# Altium PCB vfd_power_v1.PcbDoc
Units mil, origin at the board's own origin, x right, y up, seen from the top; angles counter-clockwise.
Board outline 7500 x 4000 mil, 2 copper layers (Top Layer, Bottom Layer); 84 components, 41 nets, 235 pads, 0 vias.
Unrouted connection lines stored in the file: 179.
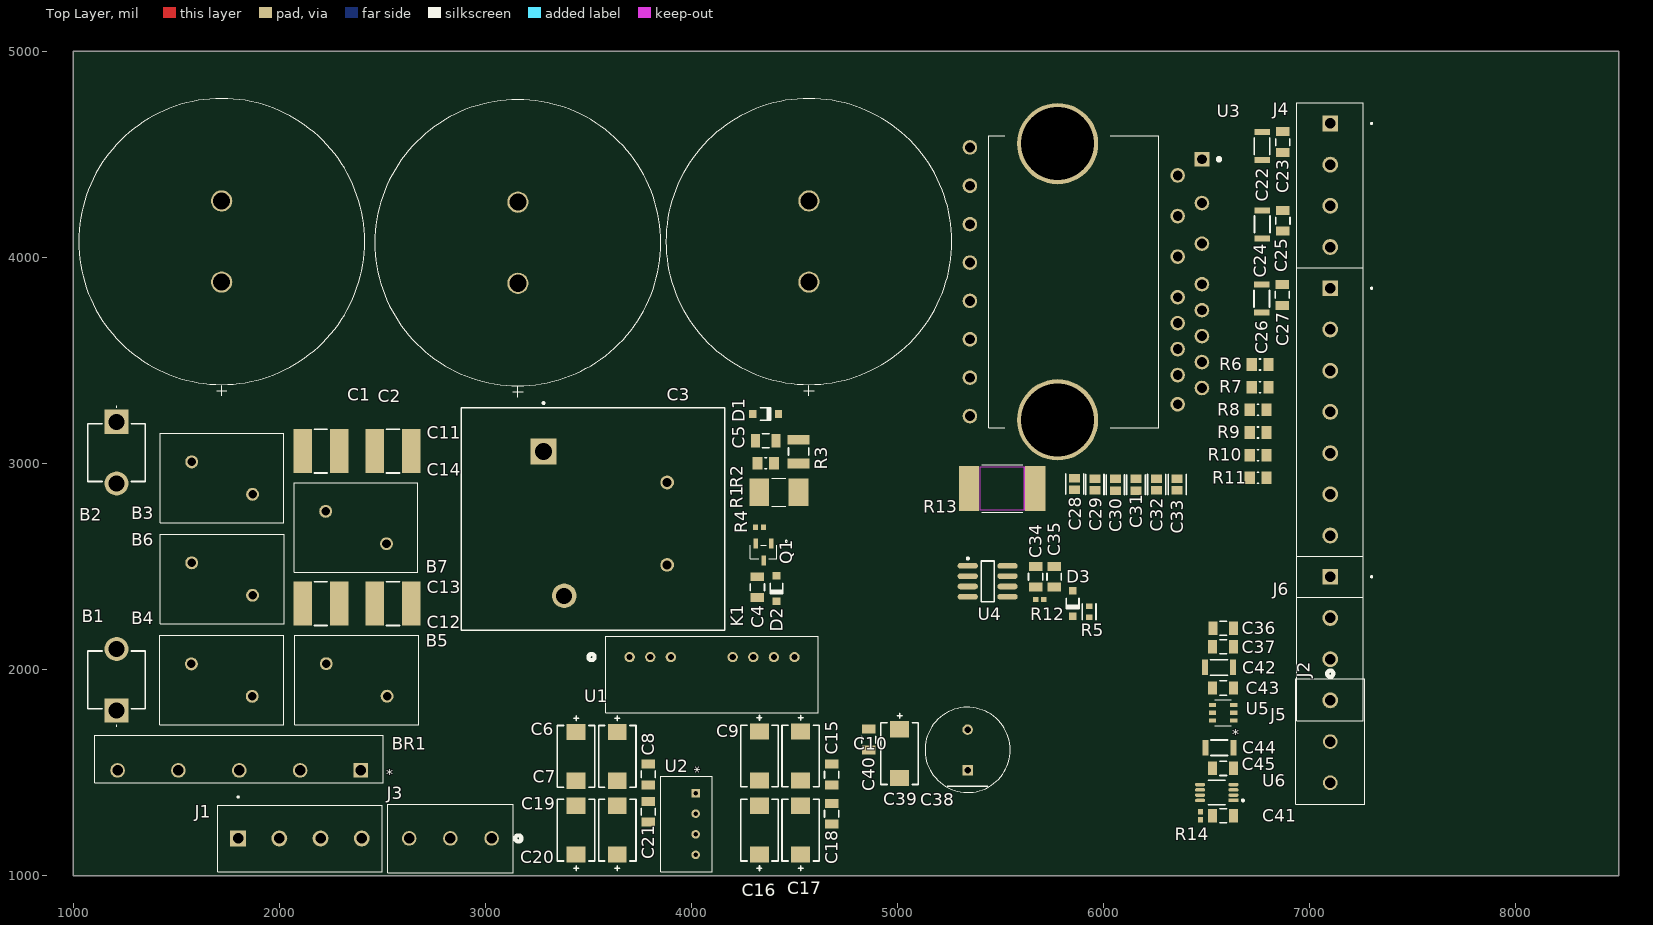
[diagram p0: Top Layer view]
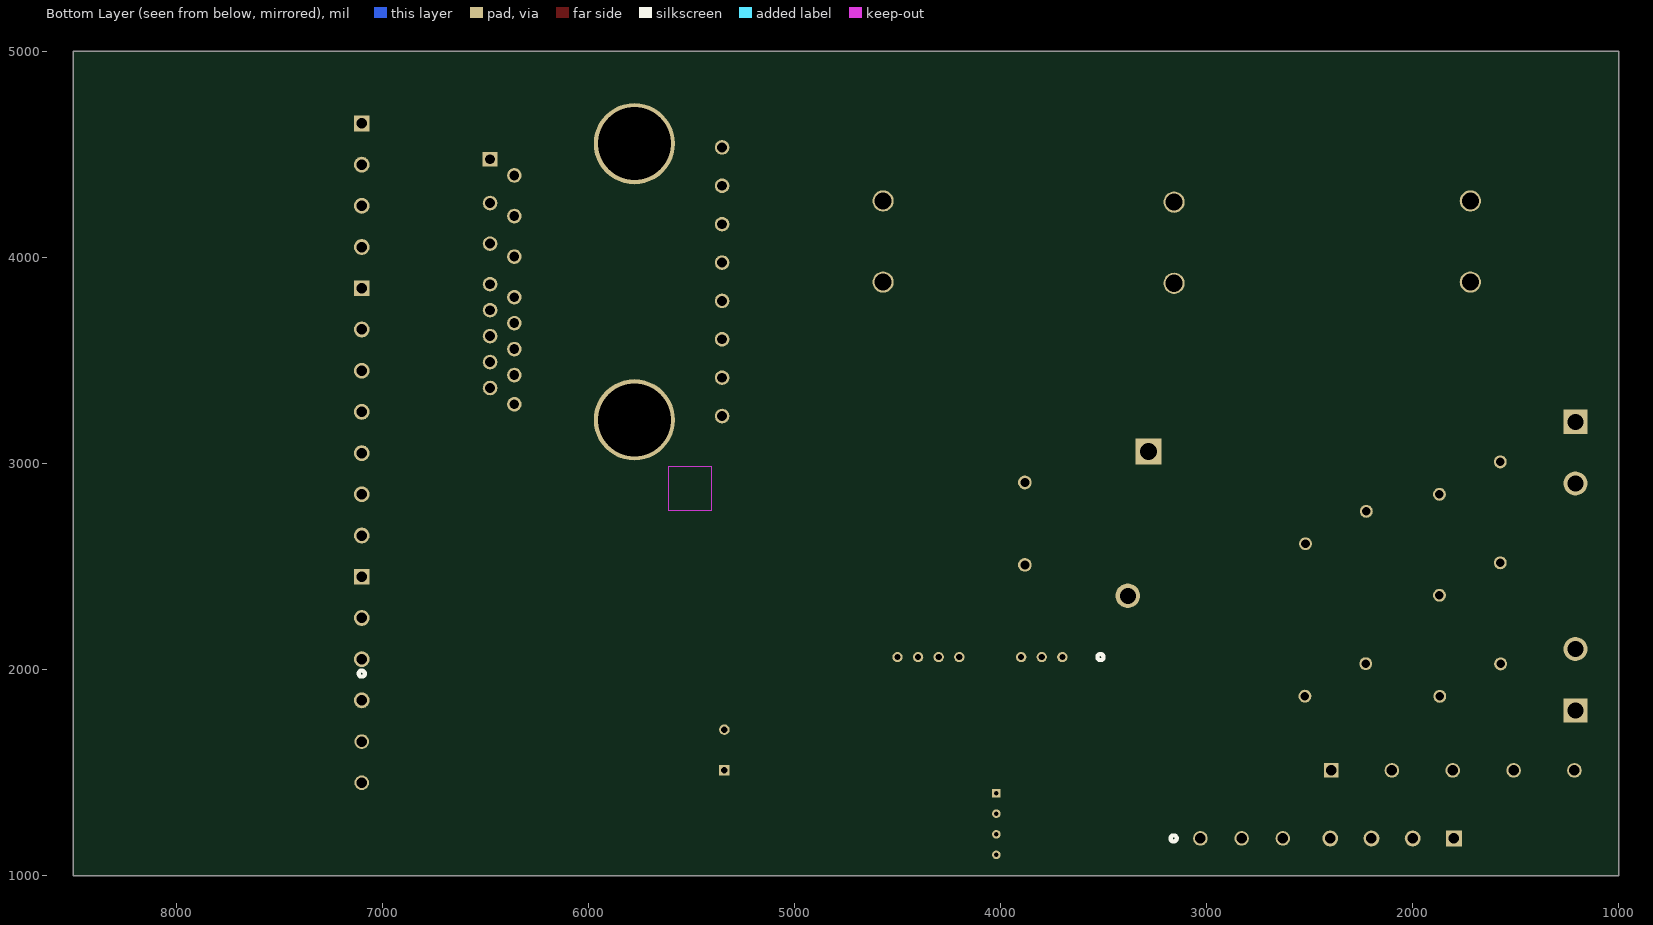
[diagram p1: Bottom Layer view, seen from below]

## Layer stack, top to bottom
Top Solder: solder mask 0.4, Solder Resist, Dk 3.5
Top Layer: signal copper 1.4
Dielectric 1: dielectric 12.6, FR-4, Dk 4.8
Bottom Layer: signal copper 1.4
Bottom Solder: solder mask 0.4, Solder Resist, Dk 3.5

## Board outline
1000,1000 1000,5000 8500,5000 8500,1000

## Design rules (kind name [scope] priority, off if disabled: settings)
Clearance [All] p1: gap=5 ignorepadtopadclearanceinfootprint=FALSE
ComponentClearance [All] p1 off: gap=10 collisioncheckmode=3 verticalgap=10 showdistances=FALSE
DiffPairsRouting [All] p1: maxlimit=13 minlimit=13 mostfreqgap=13 toplayer_minwidth=7.42 toplayer_maxwidth=13 toplayer_prefwidth=7.42 bottomlayer_minwidth=7.42 bottomlayer_maxwidth=13 bottomlayer_prefwidth=7.42 maxuncoupledlength=500
FabricationTestPointUsage TestPointUsage [All] p1: valid=0 allowmultiple=FALSE
FabricationTestpoint Testpoint [All] p1: side=3 testpointundercomponent=TRUE minsize=40 maxsize=100 preferedsize=60 minholesize=20 maxholesize=40 preferedholesize=32 testpointgrid=1 allowsidetop=TRUE allowsidebottom=TRUE usegrid=TRUE gridtolerance=0.01
Height [All] p1 off: minheight=0 maxheight=1000 prefheight=500
HoleSize [All] p1: absolutevalues=TRUE maxlimit=800 minlimit=10 maxpercent=80.000 minpercent=20.000
MatchedLengths MatchedLengths_I210Rx [InNetClass('I210Rx')] p1: tolerance=5 checknetsindiffpair=FALSE checkdiffpairvsdiffpair=TRUE checkxsignals=TRUE checkothers=TRUE
MatchedLengths MatchedLengths_I210Tx [InNetClass('I210Tx')] p2: tolerance=5 checknetsindiffpair=FALSE checkdiffpairvsdiffpair=TRUE checkxsignals=TRUE checkothers=TRUE
MatchedLengths MatchedLengths_mSATARx [InNetClass('mSATARx')] p3: tolerance=25 checknetsindiffpair=FALSE checkdiffpairvsdiffpair=TRUE checkxsignals=TRUE checkothers=TRUE
MatchedLengths MatchedLengths_mSATATx [InNetClass('mSATATx')] p4: tolerance=25 checknetsindiffpair=FALSE checkdiffpairvsdiffpair=TRUE checkxsignals=TRUE checkothers=TRUE
MatchedLengths MatchedLengths_PCIECLK [InNetClass('PCIECLK')] p5: tolerance=25 checknetsindiffpair=FALSE checkdiffpairvsdiffpair=TRUE checkxsignals=TRUE checkothers=TRUE
MatchedLengths MatchedLengths_PCIETx [InNetClass('PCIETx')] p6: tolerance=5 checknetsindiffpair=FALSE checkdiffpairvsdiffpair=TRUE checkxsignals=TRUE checkothers=TRUE
MatchedLengths MatchedLengths_PCIERx [InNetClass('PCIERx')] p7: tolerance=5 checknetsindiffpair=FALSE checkdiffpairvsdiffpair=TRUE checkxsignals=TRUE checkothers=TRUE
MinimumSolderMaskSliver [All] p1: minsoldermaskwidth=5
PlaneConnect [All] p1: planeconnectstyle=Relief reliefexpansion=20 reliefentries=4 reliefconductorwidth=15 reliefairgap=10
PolygonConnect [All] p1: connectstyle=Direct reliefconductorwidth=20 reliefentries=4 polygonreliefangle="90 Angle" airgapwidth=30
RoutingVias [All] p1: holewidth=20 width=40 viastyle="Through Hole" minholewidth=15 minwidth=35 maxholewidth=28 maxwidth=50
SilkToSilkClearance [All] p1: silktosilkclearance=5
SilkToSolderMaskClearance SilkscreenOverComponentPads [IsPad] p1: minsilkscreentomaskgap=5 clearancetoexposedcopper=TRUE
SolderMaskExpansion [All] p1: expansion=4 istentingtop=FALSE
SupplyNets "Schematic Supply Nets_7" [InNet('PGND')] p1: voltage=0.000
SupplyNets "Schematic Supply Nets_6" [InNet('EGND')] p2: voltage=0.000
SupplyNets "Schematic Supply Nets_5" [InNet('15V')] p3: voltage=0.000
SupplyNets "Schematic Supply Nets_1" [InNet('3.3V')] p4: voltage=0.000
SupplyNets "Schematic Supply Nets_3" [InNet('ISO_5V')] p5: voltage=0.000
SupplyNets "Schematic Supply Nets_2" [InNet('ISO_15V')] p6: voltage=0.000
SupplyNets "Schematic Supply Nets" [InNet('GND')] p7: voltage=0.000
Width [All] p1: maxlimit=500 minlimit=5 preferedwidth=10
20 further rules are at their usual default settings.

## Components (designator, comment, footprint, x,y, rotation, side; value= is the part's Value field where it differs from the comment)
B1 "FCLIP1" 01240061H 1210,1800 r90 top
B2 "FCLIP2" 01240061H 1210,3202 r270 top
B3 "470 V" TMOV14RP300E 1722.36,2850 r180 top
B4 "470 V" TMOV14RP300E 1722.36,2517.48 r0 top
B5 "470 V" TMOV14RP300E 2375.16,2027.89 r0 top
B6 "470 V" TMOV14RP300E 1720.64,1869.61 r180 top
B7 "470 V" TMOV14RP300E 2372.36,2610 r180 top
BR1 "GUO40-12NO1" SIP5-GUFP_LTF 2395.83,1510 r180 top
C1 "330 µF" CAP_C30_NCH 1720,3880 r90 top
C2 "330 µF" CAP_C30_NCH 3157.52,3874.19 r90 top
C3 "330 µF" CAP_C30_NCH 4570,3880 r90 top
C4 "0.1 µF" FP-CL31-IPC_C 4320,2399.75 r270 top
C5 "0.1 µF" FP-CL31-IPC_C 4360,3110 r180 top
C6 "47 µF" FP-T521X476M035ATE030-MFG 3440,1578.5 r90 top
C7 "47 µF" FP-T521X476M035ATE030-MFG 3640,1578.5 r90 top
C8 "0.1 µF" FP-CL31-IPC_C 3790,1490.25 r90 top
C9 "47 µF" FP-T521X476M035ATE030-MFG 4330,1580 r90 top
C10 "47 µF" FP-T521X476M035ATE030-MFG 4530,1580 r90 top
C11 "0.01 µF" FP-GRM55D-0_4-IPC_B 2201.4,3060 r180 top
C12 "0.01 µF" FP-GRM55D-0_4-IPC_B 2551.4,2320 r180 top
C13 "0.01 µF" FP-GRM55D-0_4-IPC_B 2201.4,2320 r0 top
C14 "0.01 µF" FP-GRM55D-0_4-IPC_B 2551.4,3060 r0 top
C15 "0.1 µF" FP-CL31-IPC_C 4680,1490 r90 top
C16 "47 µF" FP-T521X476M035ATE030-MFG 4330,1220 r270 top
C17 "47 µF" FP-T521X476M035ATE030-MFG 4530,1220 r270 top
C18 "0.1 µF" FP-CL31-IPC_C 4680,1300 r270 top
C19 "47 µF" FP-T521X476M035ATE030-MFG 3440,1220 r270 top
C20 "47 µF" FP-T521X476M035ATE030-MFG 3640,1220 r270 top
C21 "0.1 µF" FP-CL31-IPC_C 3790,1310 r270 top
C22 "10 µF" FP-CGA5L-0_3-0_1-IPC_B 6769.68,4540 r270 top
C23 "0.1 µF" FP-CL31-IPC_C 6869.68,4559.75 r90 top
C24 "10 µF" FP-CGA5L-0_3-0_1-IPC_B 6770.31,4160 r270 top
C25 "0.1 µF" FP-CL31-IPC_C 6870.31,4177.91 r90 top
C26 "10 µF" FP-CGA5L-0_3-0_1-IPC_B 6767.52,3799.97 r270 top
C27 "0.1 µF" FP-CL31-IPC_C 6867.52,3817.64 r90 top
C28 "CL21C470JBANNND" FP-CL21-IPC_C 5860,2900 r270 top
C29 "CL21C470JBANNND" FP-CL21-IPC_C 5957.52,2897.89 r270 top
C30 "CL21C470JBANNND" FP-CL21-IPC_C 6057.52,2896.46 r270 top
C31 "CL21C470JBANNND" FP-CL21-IPC_C 6157.52,2896.46 r270 top
C32 "CL21C470JBANNND" FP-CL21-IPC_C 6257.52,2897.89 r270 top
C33 "CL21C470JBANNND" FP-CL21-IPC_C 6357.52,2897.89 r270 top
C34 "0.1 µF" FP-CL31-IPC_C 5670,2449.5 r270 top
C35 "0.1 µF" FP-CL31-IPC_C 5760,2449.75 r270 top
C36 "0.1 µF" FP-CL31-IPC_C 6580.25,2200 r180 top
C37 "0.1 µF" FP-CL31-IPC_C 6579.75,2110 r180 top
C38 "220 µF" FP-RAD-TH-D_10_0_5-L_16_1-MFG 5340,1609.68 r90 top
C39 "47 µF" FP-T521X476M035ATE030-MFG 5010,1591.18 r90 top
C40 "0.1 µF" FP-CL31-IPC_C 4860,1659.68 r90 top
C41 "0.1 µF" FP-CL31-IPC_C 6580,1290 r180 top
C42 "10 µF" FP-CGA5L-0_3-0_1-IPC_B 6560,2010 r0 top
C43 "0.1 µF" FP-CL31-IPC_C 6580,1910 r180 top
C44 "10 µF" FP-CGA5L-0_3-0_1-IPC_B 6562.09,1620 r0 top
C45 "0.1 µF" FP-CL31-IPC_C 6579.75,1520 r180 top
D1 "1N4148W-7-F" DIOD-SOD123-2_V 4360,3240 r0 top
D2 "1N4148W-7-F" DIOD-SOD123-2_V 4412.5,2392.5 r270 top
D3 "1N4148W-7-F" DIOD-SOD123-2_V 5850,2320 r270 top
J1 "TB006_-508-04BE" "CUI_TB006 -508-04BE" 1800,1180 r0 top
J2 "TB006-508-03BE" CONN3_TB006-508_CUD 7100,1850 r270 top
J3 "TB006-508-03BE" CONN3_TB006-508_CUD 3030,1180 r180 top
J4 "TB006_-508-04BE" "CUI_TB006 -508-04BE" 7100,4650 r270 top
J5 "TB006_-508-04BE" "CUI_TB006 -508-04BE" 7100,2450 r270 top
J6 "TB006_-508-08BE" "CUI_TB006 -508-08BE" 7100,3850 r270 top
K1 "T9AS1D12-15" FP-T9AS1D12-15-MFG 3522.07,2729.37 r90 top
Q1 "2N7002-TP" SOT-23_MCC 4350,2570 r180 top
R1 "CRS2512-FX-1004ELF" RESC6432X75N 4424.53,2860 r180 top
R2 "1 kΩ" RESC2013X60X30ML20T20 4360.35,3000 r180 top
R3 "10 kΩ" RESC3225X60X45NL20T20 4520,3057.09 r270 top
R4 "10 kΩ" RESC1005X40X25ML05T05 4330,2690 r0 top
R5 "82 kΩ" FP-RC0603-0_55-IPC_C 5930,2280 r270 top
R6 "22 Ω" RESC2013X60X30ML20T20 6759.65,3480 r180 top
R7 "22 Ω" RESC2013X60X30ML20T20 6759.65,3370 r180 top
R8 "22 Ω" RESC2013X60X30ML20T20 6749.65,3260 r180 top
R9 "22 Ω" RESC2013X60X30ML20T20 6749.65,3150 r180 top
R10 "22 Ω" RESC2013X60X30ML20T20 6749.65,3040 r180 top
R11 "22 Ω" RESC2013X60X30ML20T20 6750,2930 r180 top
R12 "10 kΩ" RESC1005X40X25ML05T05 5690,2340 r0 top
R13 "2.5 mΩ" RES_WSLP3921_.002OHM_VIS 5507.52,2877.89 r180 top
R14 "10 kΩ" RESC1005X40X25ML05T05 6470,1289.68 r90 top
U1 "TMR 2-2413WI" TMR2WI-SINGLE_TRP 3700,2060 r0 top
U2 "NKE0305SC" SIP_NKE_11P5X6_MUR 4020,1400 r270 top
U3 "IKCM30F60GDXKMA1" IC_IKCM30F60GDXKMA1 5914.53,3881.67 r270 top
U4 "MAX4080SASA+T" MAXM-S8+2_M 5437.52,2427.89 r0 top
U5 "LT6654BHS6-1.25TRMPBF" TSOT-23_S6_LIT 6580,1790 r180 top
U6 "TLV1702AIDGKR" FP-DGK0008A-IPC_C 6549.26,1402.8 r180 top

## Footprints (in the part's own frame and the unit in brackets; to place one, negate y for a bottom-side part, rotate by r counter-clockwise, add the part's x,y. Pads: shape width x height; smd on the part's side, far side on the other; paste and mask are expansions set on the pad)
01240061H [mm]
  rect 2.97x2.97 hole 1.98: 1(0,0)
  round 2.97 hole 1.98: 2(7.6,0)
  silkscreen extent -1.9,-3.55 7.36,3.55
CAP_C30_NCH [mil]
  round 103 / inner round 60 / far side round 103 hole 83 paste-99999 mask+0: 1(0,0) 2(393.7,0)
  silkscreen extent -552,-694 891,694, body extent -492,-688 887,688, height 1261
CONN3_TB006-508_CUD [mil]
  round 71 / inner round 60 / far side round 71 hole 51 paste-99999 mask+0: 1(0,0) 2(200,0) 3(400,0)
  silkscreen extent -145,-167 505,166
"CUI_TB006 -508-04BE" [mm]
  rect 1.95x1.95 / inner round 1.95 / far side rect 1.95x1.95 hole 1.3: 1(0,0)
  round 1.95 hole 1.3: 2(5.08,0) 3(10.16,0) 4(15.24,0)
  silkscreen extent -2.54,-4.1 17.78,5.2
"CUI_TB006 -508-08BE" [mm]
  rect 1.95x1.95 / inner round 1.95 / far side rect 1.95x1.95 hole 1.3: 1(0,0)
  round 1.95 hole 1.3: 2(5.08,0) 3(10.16,0) 4(15.24,0) 5(20.32,0) 6(25.4,0) 7(30.48,0) 8(35.56,0)
  silkscreen extent -2.54,-4.1 38.1,5.2
DIOD-SOD123-2_V [mm] "SOD123, 2-Leads, Body 2.7x1.55mm, Height 1.45mm"
  rect 0.9x0.95 smd: 1(-1.575,0) 2(1.575,0)
  silkscreen extent -0.64,-0.83 0.64,0.78, body extent -1.35,-0.77 1.35,0.77, height 1.45
FP-CGA5L-0_3-0_1-IPC_B [mm]
  rect 0.756x1.906 smd paste+0 mask+0: 1(-1.725,0) 2(1.725,0)
  silkscreen extent -1.05,-0.95 1.05,0.95, body extent -2.35,-1.2 2.35,1.2, height 0.25
FP-CL21-IPC_C [mil]
  rect 41.52x53.39 smd paste+0 mask+0: 1(-28.57,0) 2(28.57,0)
  silkscreen extent -49,-44 49,44, body extent -53,-32 53,32, height 10
FP-CL31-IPC_C [mil]
  rect 43.52x65.28 smd paste+0 mask+0: 1(-50.25,0) 2(50.25,0)
  silkscreen extent -17,-34 17,34, body extent -76,-38 76,38, height 10
FP-DGK0008A-IPC_C [mm]
  rect 1.257x0.418 smd paste+0 mask+0: 1(-2.051,0.975)
  rrect100% 1.257x0.418 smd paste+0 mask+0: 2(-2.051,0.325) 3(-2.051,-0.325) 4(-2.051,-0.975) 5(2.051,-0.975) 6(2.051,-0.325) 7(2.051,0.325) 8(2.051,0.975)
  silkscreen extent -3.35,-1.5 1.05,1.5, body extent -2.78,-1.6 2.78,1.6, height 0.25
FP-GRM55D-0_4-IPC_B [mil]
  rect 90.64x212.72 smd paste+0 mask+0: 1(-88.6,0) 2(88.6,0)
  silkscreen extent -31,-106 31,106, body extent -144,-116 144,116, height 10
FP-RAD-TH-D_10_0_5-L_16_1-MFG [mm]
  rect 1.3x1.3 hole 0.8 paste-2539.97 mask+0: 1(-2.5,0)
  round 1.3 hole 0.8 paste-2539.97 mask+0: 2(2.5,0)
  silkscreen extent -5.25,-5.25 5.25,5.25, body extent -5.35,-5.35 5.35,5.35, height 0.25
FP-RC0603-0_55-IPC_C [mil]
  rect 25.93x31.97 smd paste+0 mask+0: 1(-26.64,0) 2(26.64,0)
  silkscreen extent -40,-33 40,33, body extent -44,-22 44,22, height 10
FP-T9AS1D12-15-MFG [mm]
  rect 3.16x3.16 hole 2.06 paste-2539.97 mask+0: 1(8.335,6.095)
  round 3.03 hole 1.98 paste-2539.97 mask+0: 2(-9.445,3.555)
  round 1.69 hole 1.09 paste-2539.97 mask+0: 3(-5.635,-9.145) 4(4.525,-9.145)
  silkscreen extent -13.71,-16.25 14.44,16.25, body extent -13.81,-16.35 13.81,16.35, height 0.25
FP-T521X476M035ATE030-MFG [mm]
  rect 1.99x2.33 smd paste+0 mask+0: 1(-3.01,0) 2(3.01,0)
  silkscreen extent -3.8,-2.3 5,2.3, body extent -4.13,-2.42 4.13,2.42, height 0.25
IC_IKCM30F60GDXKMA1 [mm]
  rect 1.8x1.8 / inner round 1.8 / far side rect 1.8x1.8 hole 1.2: 1(-15.1,14.3)
  round 1.8 hole 1.2: 2(-13.1,11.3) 3(-9.7,14.3) 4(-8.1,11.3) 5(-4.7,14.3) 6(-3.1,11.3) 7(0.3,14.3) 8(1.9,11.3) 9(3.5,14.3) 10(5.1,11.3) 11(6.7,14.3) 12(8.3,11.3) 13(9.9,14.3) 14(11.5,11.3) 15(13.1,14.3) 16(15.1,11.3) 17(16.555,-14.3) 18(11.825,-14.3) 19(7.095,-14.3) 20(2.365,-14.3) 21(-2.365,-14.3) 22(-7.095,-14.3) 23(-11.825,-14.3) 24(-16.555,-14.3)
  round 10.016 hole 9 mask+0: 25(-17.025,-3.5) 26(17.025,-3.5)
  silkscreen extent -18,-12 18,16.6, body extent -18,-14.55 18,14.55, height 5.6
MAXM-S8+2_M [mm] "SOIC, 8-Leads, Body 4.90x3.90mm, Pitch 1.27mm, IPC Low Density"
  oval 2.5x0.7 smd: 1(-2.45,1.905) 2(-2.45,0.635) 3(-2.45,-0.635) 4(-2.45,-1.905) 5(2.45,-1.905) 6(2.45,-0.635) 7(2.45,0.635) 8(2.45,1.905)
  silkscreen extent -2.57,-2.5 0.8,2.93, body extent -2,-2.5 2,2.5, height 1.75
RES_WSLP3921_.002OHM_VIS [mil]
  rect 98x220 smd paste+0 mask+0: 1(-161,0) 2(161,0)
  Top Layer keep-out region: -107,-106 -107,106 105,106 105,-106
  Keep-Out Layer region: -105.5,-105.5 -105.5,105.5 105.5,105.5 105.5,-105.5
  silkscreen extent -100,-115 100,115, body extent -202,-110 202,110, height 47
RESC1005X40X25ML05T05 [mm] "Chip Resistor, 2-Leads, Body 1.00x0.50mm, IPC Low Density"
  rect 0.65x0.65 smd: 1(-0.5,0) 2(0.5,0)
  body extent -0.53,-0.27 0.53,0.28, height 0.4
RESC2013X60X30ML20T20 [mm] "Chip Resistor, 2-Leads, Body 2.00x1.25mm, IPC Low Density"
  rect 1.25x1.55 smd: 1(-1.025,0) 2(1.025,0)
  silkscreen extent -0.1,-0.67 0.1,0.67, body extent -1.1,-0.72 1.1,0.72, height 0.6
RESC3225X60X45NL20T20 [mm] "Chip Resistor, 2-Leads, Body 3.20x2.50mm, IPC Medium Density"
  rect 1.2x2.7 smd: 1(-1.45,0) 2(1.45,0)
  silkscreen extent -0.45,-1.25 0.45,1.25, body extent -1.7,-1.35 1.7,1.35, height 0.6
RESC6432X75N [mm]
  rect 2.46x3.42 smd: 1(-2.425,0) 2(2.425,0)
  silkscreen extent -0.87,-1.7 0.87,1.7
SIP5-GUFP_LTF [mil]
  rect 71x71 / inner round 60 / far side rect 71x71 hole 51 paste-99999 mask+0: 1(0,0)
  round 71 / inner round 60 / far side round 71 hole 51 paste-99999 mask+0: 2(295.28,0) 3(590.55,0) 4(885.83,0) 5(1181.1,0)
  silkscreen extent -109,-171 1291,59, body extent -104,-110 1286,110, height 1142
SIP_NKE_11P5X6_MUR [mil]
  rect 42x42 / inner round 60 / far side rect 42x42 hole 22 paste-99999 mask+0: 1(0,0)
  round 42 / inner round 60 / far side round 42 hole 22 paste-99999 mask+0: 2(100,0) 3(200,0) 4(300,0)
  silkscreen extent -82,-168 382,82, body extent -77,-120 377,120, height 304
SOT-23_MCC [mil]
  rect 22x48 smd paste+0 mask+0: 1(-37.5,-42) 2(37.5,-42) 3(0,42)
  silkscreen extent -115,-57 65,33, body extent -60,-52 60,52, height 49
TMOV14RP300E [mm]
  round 1.59 hole 1.06: 1(-3.75,0) 2(3.75,-4)
  silkscreen extent -7.62,-7.5 7.62,3.5
TMR2WI-SINGLE_TRP [mil]
  round 50 / inner round 60 / far side round 50 hole 30 paste-99999 mask+0: 1(0,0) 2(100,0) 3(200,0) 6(500,0) 7(600,0) 8(700,0) 9(800,0)
  silkscreen extent -200,-270 915,100
TSOT-23_S6_LIT [mil]
  rect 34.5x20 smd paste+0 mask+0: 1(-51.75,37.4) 2(-51.75,0) 3(-51.75,-37.4) 4(51.75,-37.4) 5(51.75,0) 6(51.75,37.4)
  silkscreen extent -40,-62 40,62, body extent -55,-57 55,57, height 39

## Part data
B1 B2: library part 01240061H, "Fuse Clip 40 A - 1 Circuit Cartridge Through Hole", Manufacturer_Name=LITTELFUSE, Mouser Part Number=576-01240061H, Datasheet Link=https://www.littelfuse.com/media?resourcetype=datasheets&itemid=281b065a-d81e-4e26-9035-84e73d4bb028&filename=littelfuse-fuse-clip-124-datasheet.pdf, Geometry.Height=10.67mm, Manufacturer_Part_Number=01240061H, Mouser Price/Stock=https://www.mouser.co.uk/ProductDetail/Littelfuse/01240061H?qs=81r%252BiQLm7BSgqEC6g%252BUS9Q%3D%3D
B3 B4 B5 B6 B7: library part TMOV14RP300E, "Var MOV 300VAC/385VDC 6000A 517V Thru-Hole Radial Bulk", Manufacturer_Name=LITTELFUSE, Mouser Part Number=576-TMOV14RP300E, Datasheet Link=https://www.littelfuse.com/~/media/electronics/datasheets/varistors/littelfuse_varistor_tmov_itmov_datasheet.pdf.pdf, Geometry.Height=22mm, Manufacturer_Part_Number=TMOV14RP300E, Mouser Price/Stock=https://www.mouser.co.uk/ProductDetail/Littelfuse/TMOV14RP300E?qs=nXjUL3qLHyUFvQrdNOF75Q%3D%3D
BR1: "No Description Available", Mfr_Name="Littelfuse Inc", RefDes=RefDes, Type=Type
C1 C2 C3: library part LGW2G331MELC30, "400V", Mfr_Name=Nichicon
C4 C5 C8 C15 C18 C21 C23 C25 C27 C34 C35 C36 C37 C40 C41 C43 C45: library part CMP-13271-001731-1, "Cap Ceramic 100nF 50V X7R ±10% SMD 1206 +125°C Embossed T/R", Capacitance=100nF, Case/Package=1206, Dielectric=X7R, Max Operating Temperature=125°C, Min Operating Temperature=-55°C, Package Quantity=15000, Tolerance=10%, Voltage=50V, Depth=1.6mm, Height=0.85mm, Lead Free="Lead Free", Length=3.2mm, Mount="Surface Mount", Packaging="Tape and Reel", Radiation Hardening=No, Thickness=0.037inch, Voltage Rating=50V, Voltage Rating (DC)=50V, Width=0.063inch
C6 C7 C9 C10 C16 C17 C19 C20 C39: library part CMP-03016-000019-1, "CAP TANT POLY 47UF 35V 2917 /  / 35V", Capacitance=47uF, Case Code (Imperial)=2917, Case Code (Metric)=7343, ESR (Equivalent Series Resistance)=30mR, Max Operating Temperature=125°C, Min Operating Temperature=-55°C, Package Quantity=1, Tolerance=20%, Voltage Rating=35V, Case/Package=2917, Construction=Flat, Depth=4.3mm, Dissipation Factor=10%, Features="General Purpose", Height=4mm, Height - Seated (Max)=0.169inch, Length=7.3mm, Life (Hours)=2000Hour, Mount="Surface Mount", Number of Pins=2, Packaging="Tape and Reel", Polarity=Polar, REACH SVHC="No SVHC", RoHS Compliant=Yes, Series="KO-CAP T521", Termination=SMD/SMT, Voltage Rating (DC)=35V, Width=4.3mm
C11 C12 C13 C14: library part CMP-06035-012355-1, "Chip Multilayer Ceramic Capacitors for General Purpose, 2220, 10000pF, U2J, -750ppm/°C, 5%, 1kV", Capacitance=10nF, Case Code (Imperial)=2220, Case Code (Metric)=5750, Dielectric=U2J, Max Operating Temperature=125°C, Min Operating Temperature=-55°C, Package Quantity=1000, Tolerance=5%, Voltage Rating=1kV, Case/Package=2220, Height=2mm, Length=0.224inch, Mount="Surface Mount", Packaging="Tape and Reel", Termination=SMD/SMT, Thickness=0.087inch, Voltage Rating (DC)=1kV, Width=0.197inch
C22 C24 C26 C42 C44: library part CMP-08246-000748-1, "Cap Ceramic 10uF 25V X7R 10% Pad SMD 1206 +125°C Automotive T/R", Capacitance=10uF, Case Code (Imperial)=1206, Case Code (Metric)=3216, Dielectric=X7R, Max Operating Temperature=125°C, Min Operating Temperature=-55°C, Package Quantity=2000, Ratings=AEC-Q200, Tolerance=10%, Voltage Rating=25V, Case/Package=1206, Composition=Ceramic, Depth=1.6mm, Height=1.6mm, Length=3.2mm, Mount="Surface Mount", Packaging="Tape and Reel", Termination=SMD/SMT, Thickness=0.071inch, Voltage Rating (DC)=25V, Weight=0.000571oz, Width=1.6mm
C28 C29 C30 C31 C32 C33: library part CMP-13271-002187-1, "CL21 Series 0805 47pF 50V ±5% Tolerance C0G Multilayer Ceramic Chip Capacitor", Capacitance=47pF, Case/Package=0805, Dielectric=C0G, Max Operating Temperature=125°C, Min Operating Temperature=-55°C, Package Quantity=10000, Temperature Coefficient=300ppm/°C, Tolerance=5%, Voltage=50V, Depth=1.25mm, Height=0.65mm, Length=2mm, Material=Ceramic, Mount="Surface Mount", Packaging="Tape and Reel", Radiation Hardening=No, Thickness=0.03inch, Voltage Rating=50V, Voltage Rating (DC)=50V, Width=0.049inch
C38: library part CMP-05427-000403-1, "Aluminum Electrolytic Capacitors (Radial Lead Type) 220uF ±20% 50V", Capacitance=220uF, Case/Package=Radial, ESR (Equivalent Series Resistance)=30mR, Max Operating Temperature=105°C, Min Operating Temperature=-40°C, Package Quantity=1, Ripple Current=1.65A, Tolerance=20%, Voltage Rating=50V, Contact Plating=Tin, Diameter=10mm, Features="General Purpose", Height=16mm, Height - Seated (Max)=0.689inch, Impedance=30mR, Lead Diameter=0.6mm, Lead Free="Lead Free", Lead Pitch=5mm, Length=16mm, Life (Hours)=8000Hour, Mount="Through Hole", Number of Pins=2, Packaging="Ammo Pack", Radiation Hardening=No, REACH SVHC="No SVHC", RoHS Compliant=Yes, Series=FR, Termination=Radial, Voltage Rating (DC)=50V
D1 D2 D3: library part CMP-2000-04932-2, "Fast Switching Diode, 100 V, 0.15 A, -65 to 150 degC, 2-Pin?SOD123, RoHS, Tape and Reel", If - Forward Current=0.15A, Ir - Reverse Current=1uA, Manufacturer=DiodesIncorporated, Max Surge Current=2A, Maximum Operating Temperature=+150C, Minimum Operating Temperature=-65C, Operating Temperature Range=-65Cto+150C, Package / Case=SOD-123, Package Reference=SOD123-2, Peak Reverse Voltage=100V, Vf - Forward Voltage=1.25V, Brand=DiodesIncorporated, Configuration=Single, Datasheet URL=http://www.farnell.com/datasheets/1915529.pdf, Datasheet Version="Rev. 24-2, 10/2013", Factory Pack Quantity=3000, Height=1.25mm, Length=2.85mm, Manufacturer URL=http://www.diodes.com/, Mounting Style=SMD/SMT, Package URL=http://www.diodes.com/datasheets/ds18004.pdf, Packaging=Reel, Product=SwitchingDiodes, Product Category=Diodes-GeneralPurpose,Power,Switching, Recovery Time=4ns, RoHS=True, Series=1N4148, Type=SwitchingDiode, Unit Weight=0.000353oz, Width=1.7mm
J1 J4 J5: "2~24 Poles, Screw Type, Horizontal, 5.08 Pitch, 26~14 (AWG), Terminal Block Connector", Package=None, Availability="In Stock", Check_prices=https://www.snapeda.com/parts/TB006%20-508-04BE/CUI+Devices/view-part/?ref=eda, CUI_purchase_URL=https://www.cuidevices.com/product/interconnect/connectors/terminal-blocks/tb006-508-series?utm_source=snapeda.com&utm_medium=referral&utm_campaign=snapedaBOM, MF="CUI Devices", MP="TB006 -508-04BE", Price=None, Purchase-URL="https://pricing.snapeda.com/search/part/TB006 -508-04BE/?ref=eda", SnapEDA_Link=https://www.snapeda.com/parts/TB006%20-508-04BE/CUI+Devices/view-part/?ref=snap
J2 J3: "No Description Available", Mfr_Name="Same Sky", RefDes=RefDes, Type="Wire to Board"
J6 R1: Package=None, Availability=Unavailable, Price=None
  J6: MF="{'manufacturer': u'CUI Devices'}", MP="TB006 -508-08BE"
  R1: MP=CRS2512-FX-1004ELF
K1: library part CMP-03395-000224-1, "RELAY GEN PURPOSE SPST 30A 15V", Coil Current=67mA, Coil Power=1W, Coil Resistance=225R, Coil Voltage (DC)=15V, Contact Current Rating=30A, Contact Voltage Rating (AC)=277V, Max Operating Temperature=85°C, Min Operating Temperature=-55°C, Package Quantity=50, Coil Type=Non-Latching, Contact Material=Silver, Depth=27.43mm, ELV=Non-Compliant, Height=20.4mm, Lead Free="Lead Free", Length=32.5mm, Max Voltage Rating (AC)=277V, Mount="Through Hole", Number of Pins=4, Operate Time=15ms, Packaging=Bulk, Power Consumption=1W, Radiation Hardening=No, Relay Type="General Purpose", Release Time=15ms, RoHS Compliant=Yes, Series=T9A, Termination=PCB, Throw Configuration=SPST, Weight=0.918oz, Width=27.4mm
Q1: "No Description Available", Mfr_Name=MCC, Type=Transistors
R2: library part CMP-2001-04656-1, "±5%", Manufacturer="KOA Speer", Part Number=RK73B2ATTD102J
R3: library part CMP-2005-01993-1, "±1%, 0.5W", Manufacturer="Vishay Dale", Part Number=CRCW121010K0FKEA
R4 R12 R14: library part CMP-2002-01181-1, "±5%", Manufacturer=Panasonic, Part Number=ERT-J0EM103J
R5: library part CMP-03412-048229-1, "RES 82K OHM 5% 1/10W 0603", Case Code (Imperial)=0603, Case Code (Metric)=1608, Max Operating Temperature=155°C, Max Power Dissipation=100mW, Min Operating Temperature=-55°C, Package Quantity=1, Resistance=82kR, Resistance Tolerance=5%, Resistor Type="Thick Film", Temperature Coefficient=100ppm/°C, Voltage Rating=75V, Voltage Rating (DC)=50V, Case/Package=0603, Construction=Rectangular, Depth=0.8mm, Features="Moisture Resistant", Height=0.022inch, Lead Free="Lead Free", Length=0.063inch, Military Standard=Not, Number of Pins=2, Number of Terminations=2, Packaging="Tape and Reel", Power Rating=100mW, REACH SVHC="No SVHC", RoHS Compliant=Yes, Series=RC, Size Code=0603, Termination=SMD/SMT, Tolerance=5%, Weight=7.1E-05oz, Width=0.8mm
R6 R7 R8 R9 R10 R11: library part CMP-2001-04578-1, Manufacturer="KOA Speer", Part Number=RK73B2ATTD220J
R13: library part WSLP39212L500FEA, "±1%, 5W", Mfr_Name=Vishay
U1: library part CMP-01539-55835505-1, "TMR 2-2413WI Module DC-DC 24VIN 1-OUT 15V 135A 2W 7-Pin SIP", Case/Package=SIP, Isolation Voltage=1.5kV, Max Operating Temperature=85°C, Min Operating Temperature=-40°C, Nominal Input Voltage=24V, Output Current=135A, Output Power=2W, Output Voltage=15V, Depth=9.3mm, Isolation=Isolated, Length=26mm, Mount="Through Hole", NexarPartId=55835505, Number of Outputs=1, Number of Pins=7, Radiation Hardening=No, RoHS=Compliant
U2: "No Description Available", Mfr_Name=Murata, RefDes=RefDes, Type=Type
U3: "Fully isolated Dual In-Line molded module", Package="PowerDIP-24 Infineon", Availability="In Stock", Check_prices=https://www.snapeda.com/parts/IKCM30F60GDXKMA1/Infineon+Technologies/view-part/?ref=eda, MF="Infineon Technologies", MP=IKCM30F60GDXKMA1, Price=None, Purchase-URL=https://pricing.snapeda.com/search?q=IKCM30F60GDXKMA1&ref=eda, SnapEDA_Link=https://www.snapeda.com/parts/IKCM30F60GDXKMA1/Infineon+Technologies/view-part/?ref=snap
U4: library part CMP-0252-00176-1, "76 V, High-Side, Uni-directional Current-Sense Amplifier, 60 V / V Gain, -40 to 125 degC, 8-Pin SOIC (S8+2), Pb-Free, Tape and Reel", Bi-Dir. Curr. Sense=No, Code_JEDEC=MS012, ComponentLink1Description="Manufacturer URL", ComponentLink1URL=http://www.maximintegrated.com/, ComponentLink2Description=Datasheet, ComponentLink2URL=http://datasheets.maximintegrated.com/en/ds/MAX4080-MAX4081.pdf, ComponentLink3Description="Package Specification", ComponentLink3URL=http://pdfserv.maximintegrated.com/package_dwgs/21-0041.PDF, DatasheetVersion="Rev. 4", Gain="5 V/V, 20 V/V ,60 V/V", Industry Qualified="Automotive - AECQ100, Automotive - General", Mounting Technology="Surface Mount", PackageDescription="8-Pin Small-Outline IC, Narrow (0.15in) (S8+2), Body 4.90 x 3.90 mm, Pitch 1.27 mm", PackageReference=S8+2, PackageVersion="Rev. D, 10/2012", PartNumber=MAX4080SASA+T
U5: "No Description Available", Mfr_Name="Analog Devices Inc", RefDes=RefDes, Type=Type
U6: library part CMP-04896-000101-1, "IC COMPARATOR DUAL 8VSSOP", Case/Package=VSSOP, Input Bias Current=15nA, Input Offset Voltage (Vos)=3.5mV, Max Dual Supply Voltage=18V, Max Operating Temperature=125°C, Max Supply Voltage=36V, Min Dual Supply Voltage=1.1V, Min Operating Temperature=-40°C, Min Supply Voltage=2.2V, Nominal Supply Current=55uA, Output Current=20mA, Package Quantity=2500, Power Supply Rejection Ratio (PSRR)=-96.48dB, Quiescent Current=75uA, Contact Plating=Gold, Lead Free="Lead Free", Max Input Current=15nA, Mount="Surface Mount", Number of Channels=2, Number of Elements=2, Number of Pins=8, Packaging="Tape and Reel", Propagation Delay=560ns, REACH SVHC="No SVHC", Response Time=780ns, RoHS Compliant=Yes, Series=-, Type="General Purpose"

## Nets (pads, with @x,y where several pads share a name; then routed paths per layer and width w, separated by ;. In a path a pad name is that pad's centre, name@x,y a point inside that pad or via, vN(x,y) a via of type N, cw(c..) or ccw(c..) an arc to the next point about the centre after c; other vN are vias at no path point)
3.3V: C19.2 C20.2 C21.2 J3.1 U2.2
15V: C6.2 C7.2 C8.2 J3.3 U1.2
+_VIN: B1.1 BR1.5
EGND: B7.1 C14.2
GND: C6.1 C7.1 C8.1 C19.1 C20.1 C21.1 J3.2 U1.1 U1.3 U2.1
HIN(U): C28.1 R6.2 U3.7
HIN(V): C29.1 R7.2 U3.8
HIN(W): C30.1 R8.2 U3.9
ISO_5V: C16.2 C17.2 C18.2 D1.2 D3.2 J2.1 R5.2 U2.4
ISO_15V: C4.2 C9.2 C10.2 C15.2 C36.2 C37.2 C38.2 C39.2 C40.2 C42.1 C43.2 D2.2 J2.3 K1.3 R14.2 U1.6 U3.13 U4.2 U5.4 U6.8
ITRIP: C41.2 R14.1 U3.15 U6.1
ITRIP+: C34.2 R12.1 U4.5 U6.3
LIN(U): C31.1 R9.2 U3.10
LIN(V): C32.1 R10.2 U3.11
LIN(W): C33.1 R11.2 U3.12
NetB2_1: B2.1 B3.2 C1.2 C2.2 C3.2 K1.2
NetC4_1: C4.1 D2.1 K1.4 Q1.3
NetC44_1: C44.1 C45.2 U5.6 U6.2
NetK1_1: K1.1 R1.2
NetR1_1: R1.1 R2.1 R3.2
NU_NV_NW_RS+: R13.2 U3.17 U3.18 U3.19 U4.1
OUT0: J6.1 R6.1
OUT1: J6.2 R7.1
OUT2: J6.3 R8.1
OUT3: J6.4 R9.1
OUT4: J6.5 R10.1
OUT5: J6.6 R11.1
OUT6: J6.7 Q1.1 R4.2
P_VIN1: C5.2 D1.1 J5.1 R2.2 U3.23
PGND: B3.1 BR1.1 C1.1 C2.1 C3.1 C5.1 C9.1 C10.1 C15.1 C16.1 C17.1 C18.1 C28.2 C29.2 C30.2 C31.2 C32.2 C33.2 C34.1 C35.1 C36.1 C37.1 C38.1 C39.1 C40.1 C41.1 C42.2 C43.1 C44.2 C45.1 J1.4 J2.2 J4.4 J5.4 J6.8 Q1.2 R3.1 R4.1 R13.1 U1.9 U2.3 U3.16 U4.4 U4.8 U5.1 U5.2 U6.4
U_VS(U): C22.1 C23.2 J4.1 U3.1 U3.22
V_VS(V): C24.1 C25.2 J4.2 U3.3 U3.21
VB(U): C22.2 C23.1 U3.2
VB(V): C24.2 C25.1 U3.4
VB(W): C26.2 C27.1 U3.6
VFO_VIN3: J5.3 R5.1 U3.14
VIN2: C35.2 D3.1 J5.2 R12.2
W_VS(W): C26.1 C27.2 J4.3 U3.5 U3.20
~1: B4.2 B5.2 B7.2 BR1.2 C11.1 C12.1 C14.1 J1.3
~2: B4.1 B6.2 BR1.4 C11.2 C13.1 J1.1
~3: B5.1 B6.1 BR1.3 C12.2 C13.2 J1.2
pads on no net: B1.2 B2.2 U1.7 U1.8 U3.24 U3.25 U3.26 U4.3 U4.6 U4.7 U5.3 U5.5 U6.5 U6.6 U6.7

## Text inside footprints (layer, text, board x,y; h text height)
BR1: Top Overlay "*" at 2552.77,1535 h50 r180; Mechanical 13 "*" at 2502.77,1535 h50 r180
U2: Top Overlay "*" at 3995,1529.5 h50 r270; Mechanical 13 "*" at 3995,1479.5 h50 r270
U5: Top Overlay "*" at 6659,1728.6 h50 r180; Mechanical 13 "*" at 6612,1786 h50 r180